# EAGLE board gegensprechanlage (EAGLE 6.1)
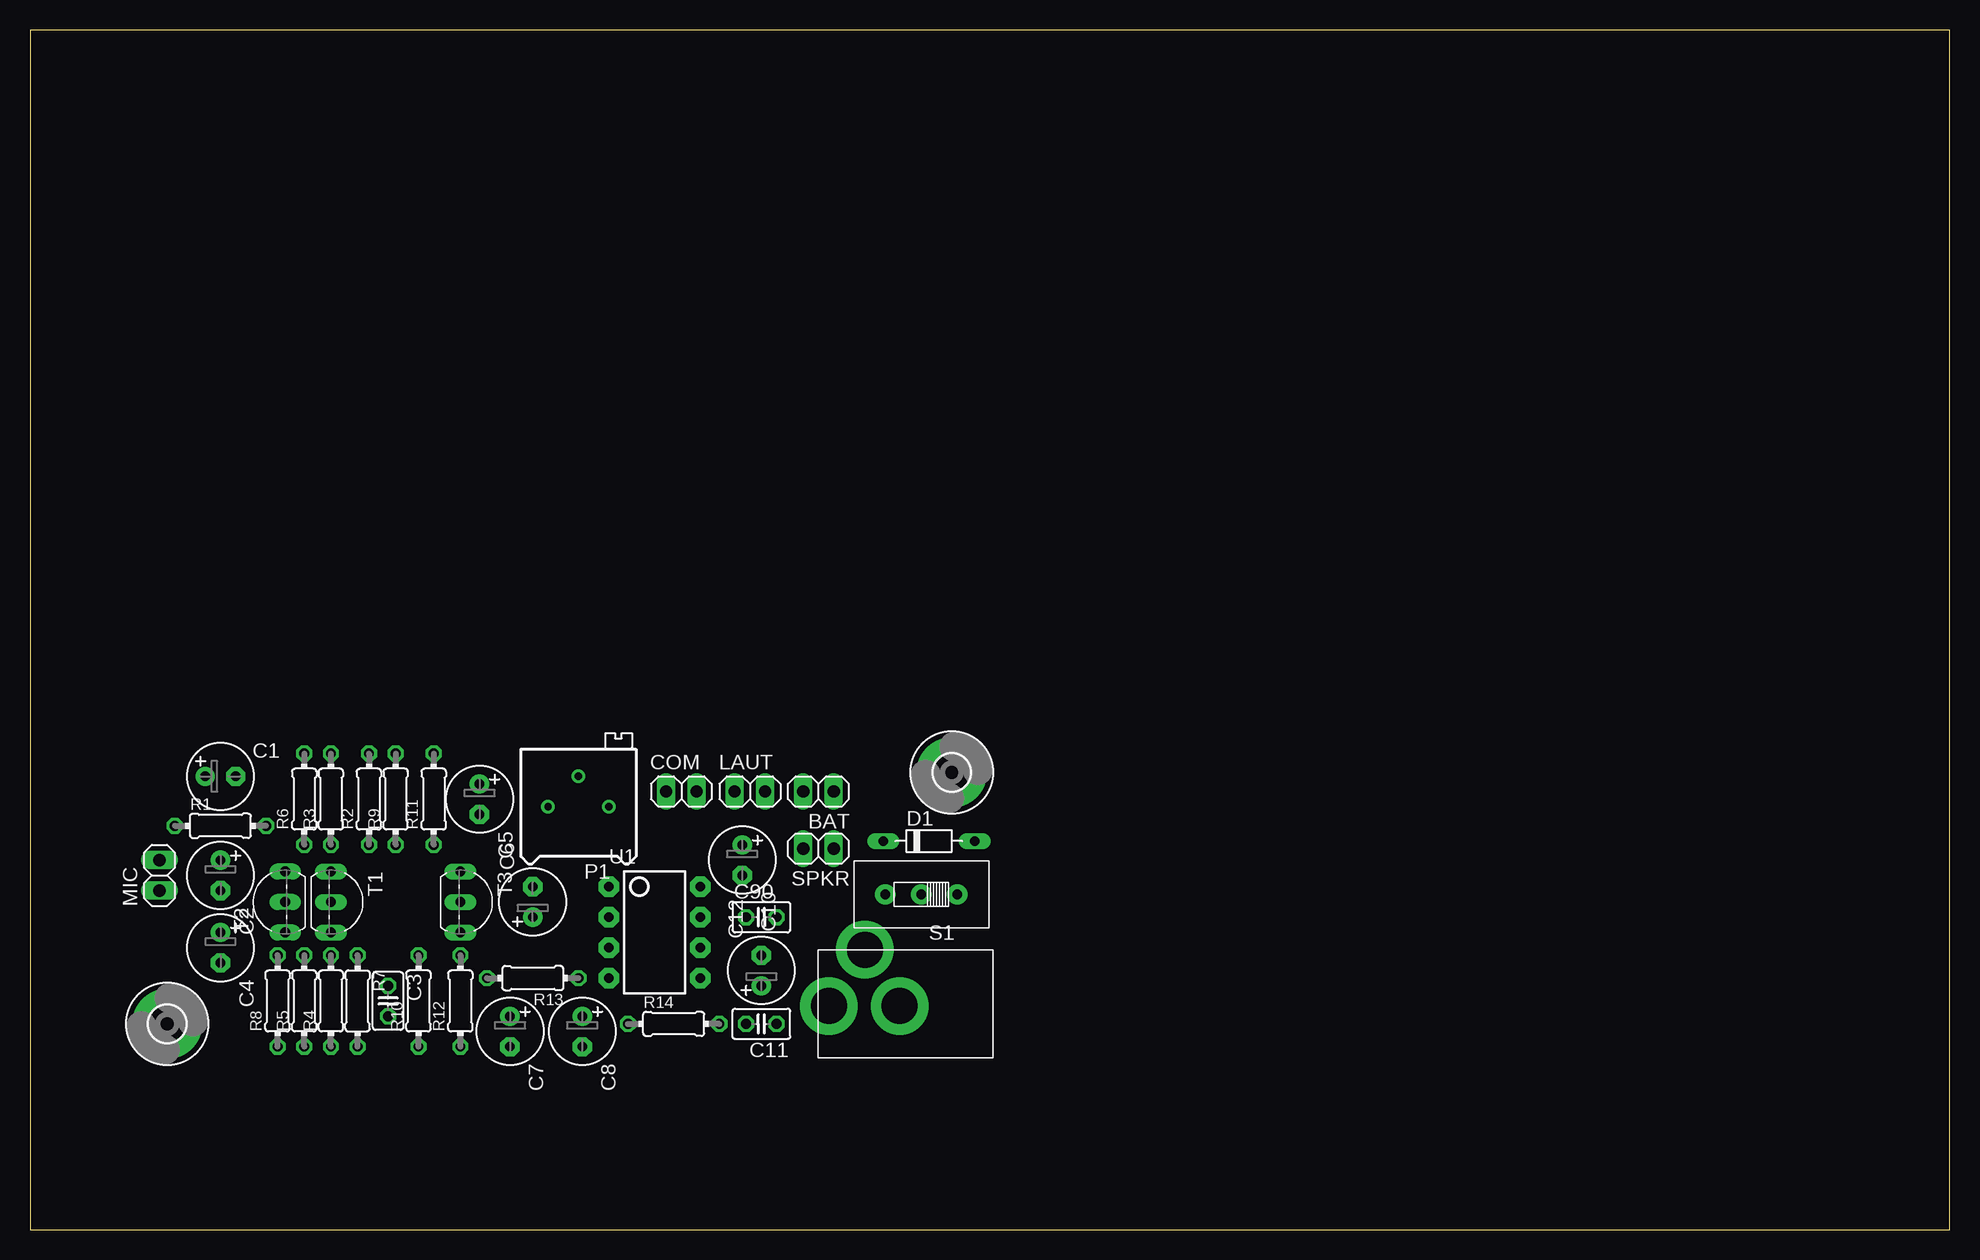
[diagram p0: board, top side]
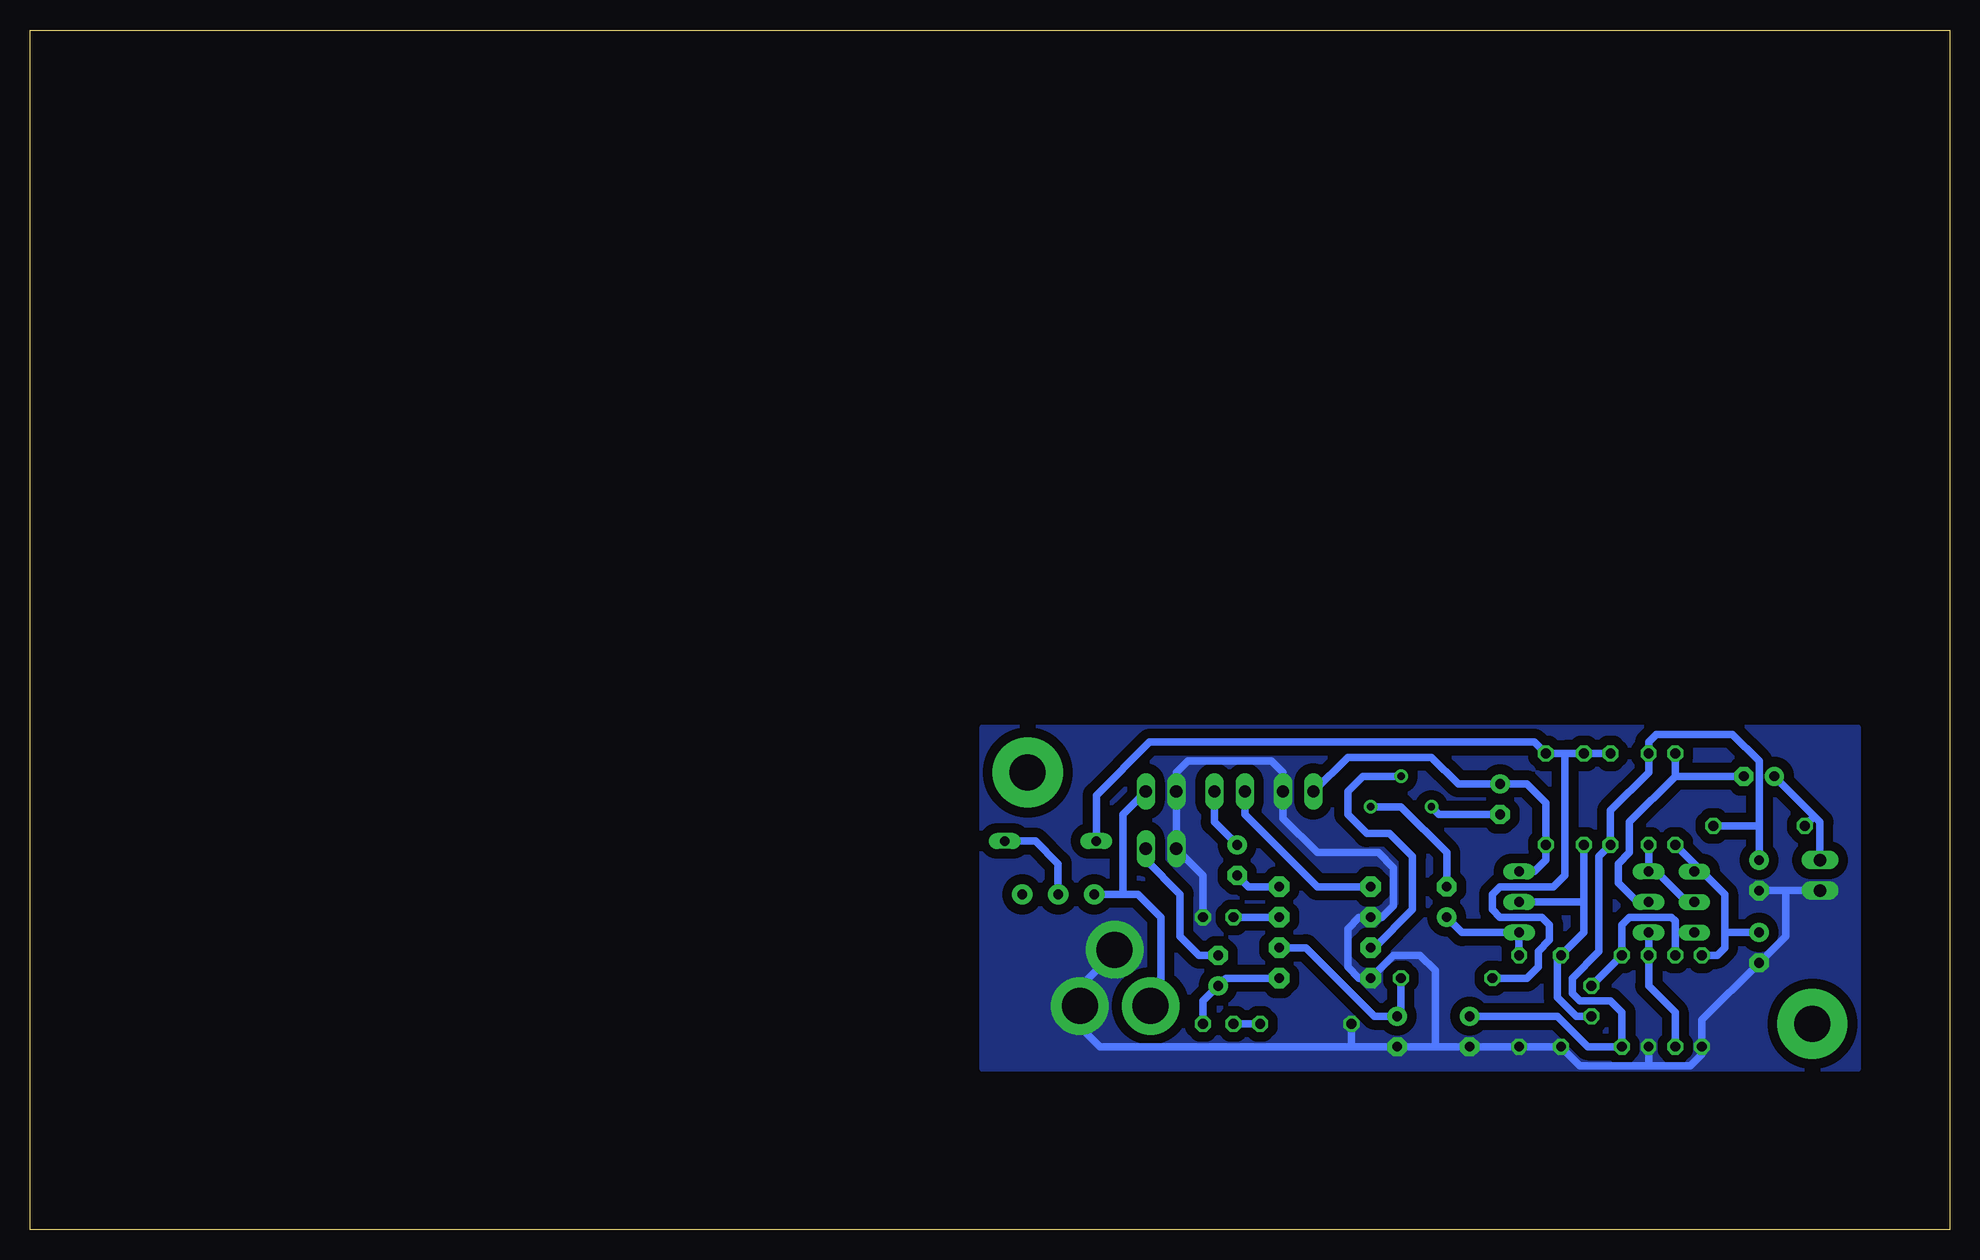
[diagram p1: board, bottom side, seen from below]

Size 160 x 100 mm. Coordinates in mm from the lower left corner, seen from the top.
Outline: 0,0 160,0 160,100 0,100 0,0
Copper layers (1*16): Top 0.035mm / dielectric 1.5mm / Bottom 0.035mm
Design rules: minimum track width 10mil, minimum drill 24mil, track to track 12mil, track to pad 12mil, pad to pad 12mil, via to via 12mil, smd to smd 10mil, copper to edge 12mil, drill to drill 12mil, minimum pad ring 10mil, minimum via ring 10mil, stop-mask expansion 4mil, vias tented up to drill 0mil, thermal gap 12mil

## Footprints (pad centres in the part's own frame; a part is rotated, then mirrored left to right if it is on the bottom)
1X02 = drill 1.016 long: 1 -1.27,0; 2 1.27,0
E2,5-6 = drill 0.813 pad 1.6: + -1.27,0 | drill 0.813 pad 1.6 octagon: - 1.27,0
C025-025X050 = drill 0.813 octagon: 1 -1.27,0; 2 1.27,0
D-7.5 = drill 0.813 long: A 3.81,0; C -3.81,0
3,0-PAD = drill 3 pad 5.842: B3,0 0,0
RTRIM64P = drill 0.61: 1 0,-2.54; 2 2.54,0; 3 0,2.54
0204/7 = drill 0.813 octagon: 1 -3.81,0; 2 3.81,0
EG1218 = drill 0.8 pad 1.676: O -3,0; P 0,0; S 3,0
TO92-CBE = drill 0.813 long: B 0,0; C -2.54,0; E 2.54,0
DIP08 = drill 0.813 pad 1.727 octagon: 1 -3.81,-3.81; 2 -1.27,-3.81; 3 1.27,-3.81; 4 3.81,-3.81; 5 3.81,3.81; 6 1.27,3.81; 7 -1.27,3.81; 8 -3.81,3.81
PJ-102A = drill 3 pad 4.8: RING 0.1,-3.39; RING_SW -4.6,-6.29; TIP 0.1,-9.29

## Placement (x,y rotation side)
BAT  [1X02]  65.72,36.51 180 top
C1  4u7  [E2,5-6]  15.88,37.78 0 top
C2  1u  [E2,5-6]  15.88,29.53 270 top
C3  180n  [C025-025X050]  29.84,19.05 270 top
C4  1u  [E2,5-6]  15.88,23.5 270 top
C5  1u  [E2,5-6]  37.47,35.88 270 top
C6  1u  [E2,5-6]  41.91,27.3 90 top
C7  10u  [E2,5-6]  40.01,16.51 270 top
C8  10u  [E2,5-6]  46.04,16.51 270 top
C10  10u  [E2,5-6]  59.37,30.8 270 top
C11  47n  [C025-025X050]  60.96,17.14 180 top
C12  220u  [E2,5-6]  60.96,21.59 90 top
C90  100n  [C025-025X050]  60.96,26.04 0 top
COM  [1X02]  54.29,36.51 0 top
D1  1N4148  [D-7.5]  74.93,32.38 0 top
H1  MOUNT-PAD-ROUND3.0  [3,0-PAD]  76.83,38.1 0 top
H2  MOUNT-PAD-ROUND3.0  [3,0-PAD]  11.43,17.14 0 top
LAUT  [1X02]  60.01,36.51 0 top
MIC  [1X02]  10.79,29.53 90 top
P1  100k  [RTRIM64P]  45.72,35.24 90 top
R1  1k8  [0204/7]  15.88,33.66 0 top
R2  47  [0204/7]  28.26,35.88 90 top
R3  6k8  [0204/7]  25.08,35.88 90 top
R4  330  [0204/7]  25.08,19.05 90 top
R5  220k  [0204/7]  22.86,19.05 90 top
R6  2k2  [0204/7]  22.86,35.88 90 top
R7  2k2  [0204/7]  27.3,19.05 270 top
R8  470  [0204/7]  20.64,19.05 90 top
R9  330k  [0204/7]  30.48,35.88 90 top
R10  120k  [0204/7]  32.38,19.05 90 top
R11  22k  [0204/7]  33.66,35.88 90 top
R12  22k  [0204/7]  35.88,19.05 90 top
R13  47  [0204/7]  41.91,20.95 180 top
R14  10  [0204/7]  53.66,17.14 0 top
S1  [EG1218]  74.3,27.94 180 top
SPKR  [1X02]  65.72,31.75 180 top
T1  BC550C  [TO92-CBE]  25.08,27.3 270 top
T2  BC517  [TO92-CBE]  21.27,27.3 90 top
T3  BC550C  [TO92-CBE]  35.88,27.3 270 top
U1  LM386  [DIP08]  52.07,24.77 270 top
U$1  2.1MMJACKTHM  [PJ-102A]  75.88,18.73 270 top

## Library data of the parts
BAT COM LAUT MIC SPKR = pinhead
C1-C8 C10-C12 C90 P1 R1-R14 = rcl
D1 = diode
H1 H2 = holes
S1 = _MY_OWN_LIB
T1-T3 = transistor
U1 = SparkFun-AnalogIC
U$1 = adafruit

## Nets
GND: BAT.2 C2.- C4.- C7.- C8.- C90.2 COM.2 MIC.1 R4.1 R8.1 R10.1 R12.1 R14.1 SPKR.2 U1.2 U1.4 U$1.RING U$1.RING_SW
N$1: C1.- R6.2 T1.B
N$2: C1.+ MIC.2 R1.1
N$3: R3.1 T1.C T2.B
N$4: R4.2 R5.1 T1.E
N$5: C3.1 R5.2 R7.1 T2.C
N$6: C10.+ LAUT.2
N$7: C4.+ R6.1 R8.2 T2.E
N$8: C2.+ C7.+ R1.2 R2.1 R3.2 R7.2
N$9: C3.2 R9.1 R10.2 T3.B
N$10: D1.C R2.2 R9.2 R11.2 R13.2
N$11: C10.- U1.8
N$12: C6.+ R12.2 T3.E
N$13: C6.- P1.1
N$14: P1.2 U1.3
N$15: C5.+ COM.1 R11.1 T3.C
N$16: C5.- P1.3
N$17: C90.1 U1.7
N$18: C8.+ R13.1 U1.6
N$19: LAUT.1 U1.1
N$20: C11.1 C12.+ U1.5
N$21: C11.2 R14.2
N$22: C12.- SPKR.1
N$24: BAT.1 S1.S U$1.TIP
N$25: D1.A S1.P

## Tracks (layer width: path | path; a pad name or v marks a point on that pad's centre or on a via)
GND
  Bottom 0.61: R4.1 25.08,13.65 | 25.08,13.65 30.8,13.65 R10.1 R12.1 C7.- | 39.37,15.24 C7.- | C7.- 42.86,15.24 | 42.86,15.24 C8.- 49.85,15.24 | C2.- 13.65,28.26 | 13.65,28.26 MIC.1 | 42.86,15.24 42.86,21.59 44.13,22.86 46.35,22.86 U1.4 49.21,20.95 50.16,21.91 50.16,25.08 49.21,26.04 U1.2 47.31,26.04 46.35,26.99 46.35,30.16 47.62,31.43 52.7,31.43 55.56,34.29 COM.2 55.56,38.1 56.52,39.05 63.5,39.05 64.45,38.1 BAT.2 SPKR.2 62.23,29.53 C90.2 | R14.1 49.85,15.24 | 25.08,13.65 21.59,13.65 20.64,14.61 20.64,17.46 C4.- 13.65,24.45 13.65,28.26 | 49.85,15.24 70.8,15.24 72.39,16.83 72.39,20.32 69.22,23.5
  pour Bottom (isolate 0.813, no thermals): 7.62,13.34 80.64,13.34 80.64,41.91 7.62,41.91
N$1
  Bottom 0.61: T1.B 26.04,27.3 27.62,28.89 27.62,30.48 26.67,31.43 26.67,33.97 22.86,37.78 | R6.2 22.86,37.78 | C1.- 22.86,37.78
N$2
  Bottom 0.61: MIC.2 10.79,33.97 11.27,34.45 | 11.27,34.45 C1.+ | R1.1 11.27,34.45
N$3
  Bottom 0.61: R3.1 T1.C 24.45,29.84 21.91,27.3 T2.B
N$4
  Bottom 0.61: T1.E R4.2 25.08,20.32 22.86,18.1 R5.1
N$5
  Bottom 0.61: C3.1 R7.1 27.3,25.4 26.67,26.04 23.18,26.04 22.86,25.72 22.86,24.77 | 22.86,24.77 R5.2 | T2.C 22.86,24.77
N$6
  Bottom 0.61: LAUT.2 61.28,33.97 C10.+
N$7
  Bottom 0.61: 21.11,30.32 18.73,27.94 18.73,24.77 | 21.11,30.32 R6.1 | T2.E 21.11,30.32 | 18.73,24.77 C4.+ | R8.2 19.37,22.86 18.73,23.5 18.73,24.77
N$8
  Bottom 0.61: C7.+ 32.7,17.78 30.16,15.24 R7.2 27.3,18.1 28.26,19.05 30.8,19.05 31.43,19.68 31.43,20.95 29.21,23.18 29.21,31.11 R2.1 28.26,34.92 25.08,38.1 R3.2 25.08,40.64 24.45,41.27 18.1,41.27 15.88,39.05 15.88,33.66 | 15.88,33.66 C2.+ | R1.2 15.88,33.66
N$9
  Bottom 0.61: 30.48,27.3 T3.B | R9.1 30.48,27.3 | 30.48,27.3 30.48,24.77 31.91,23.34 R10.2 32.7,22.54 32.7,19.37 31.11,17.78 C3.2
N$10
  Bottom 0.61: R2.2 R9.2 32.07,39.69 | 32.07,39.69 R11.2 34.61,40.64 66.67,40.64 71.12,36.2 D1.C | 32.07,39.69 32.07,29.53 33.02,28.57 37.47,28.57 38.1,27.94 38.1,26.67 37.47,26.04 33.97,26.04 33.34,25.4 33.34,24.13 34.29,23.18 34.29,21.91 35.24,20.95 R13.2
N$11
  Bottom 0.61: U1.8 58.42,28.57 C10.-
N$12
  Bottom 0.61: C6.+ 40.64,24.77 T3.E R12.2
N$13
  Bottom 0.61: C6.- 41.91,31.43 45.72,35.24 P1.1
N$14
  Bottom 0.61: U1.3 47.94,23.5 44.77,26.67 44.77,31.11 46.67,33.02 48.58,33.02 50.16,34.61 50.16,36.51 48.9,37.78 P1.2
N$15
  Bottom 0.61: T3.C 34.61,29.84 33.66,30.8 R11.1 33.66,35.56 35.24,37.15 C5.+ 40.96,37.15 43.18,39.37 50.16,39.37 COM.1
N$16
  Bottom 0.61: C5.- 42.55,34.61 P1.3
N$17
  Bottom 0.61: U1.7 C90.1
N$18
  Bottom 0.61: R13.1 45.72,18.1 C8.+ 47.94,17.78 53.66,23.5 U1.6
N$19
  Bottom 0.61: U1.1 52.7,28.57 58.74,34.61 LAUT.1
N$20
  Bottom 0.61: U1.5 60.33,20.95 60.64,20.64 C12.+ 62.23,19.05 C11.1
N$21
  Bottom 0.61: R14.2 C11.2
N$22
  Bottom 0.61: C12.- 62.55,22.86 64.14,24.45 64.14,27.94 66.99,30.8 SPKR.1
N$24
  Bottom 0.61: U$1.TIP 66.14,18.95 65.72,19.37 65.72,26.04 67.63,27.94 68.9,27.94 | 68.9,27.94 S1.S | BAT.1 68.9,34.61 68.9,27.94
N$25
  Bottom 0.61: D1.A 76.2,32.38 74.3,30.48 S1.P